# EAGLE board TSAL_rev01 (EAGLE 6.6.0)
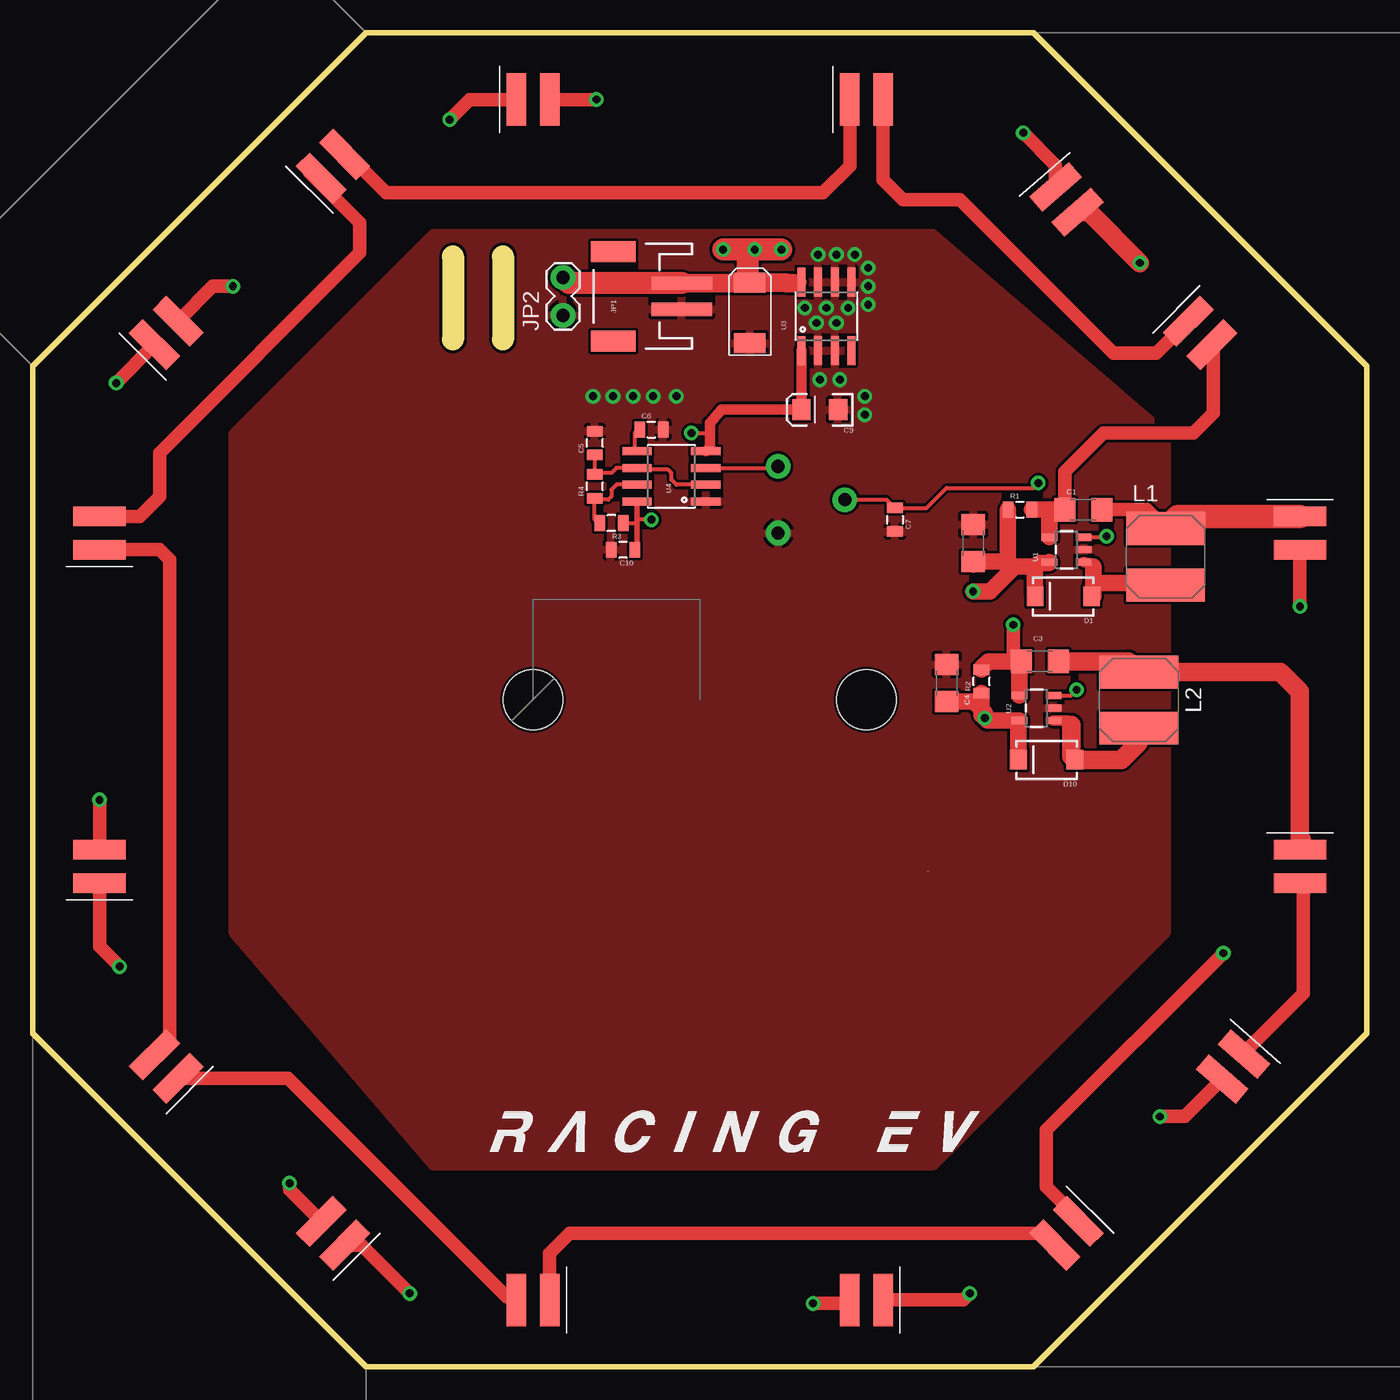
[diagram p0: board, top side]
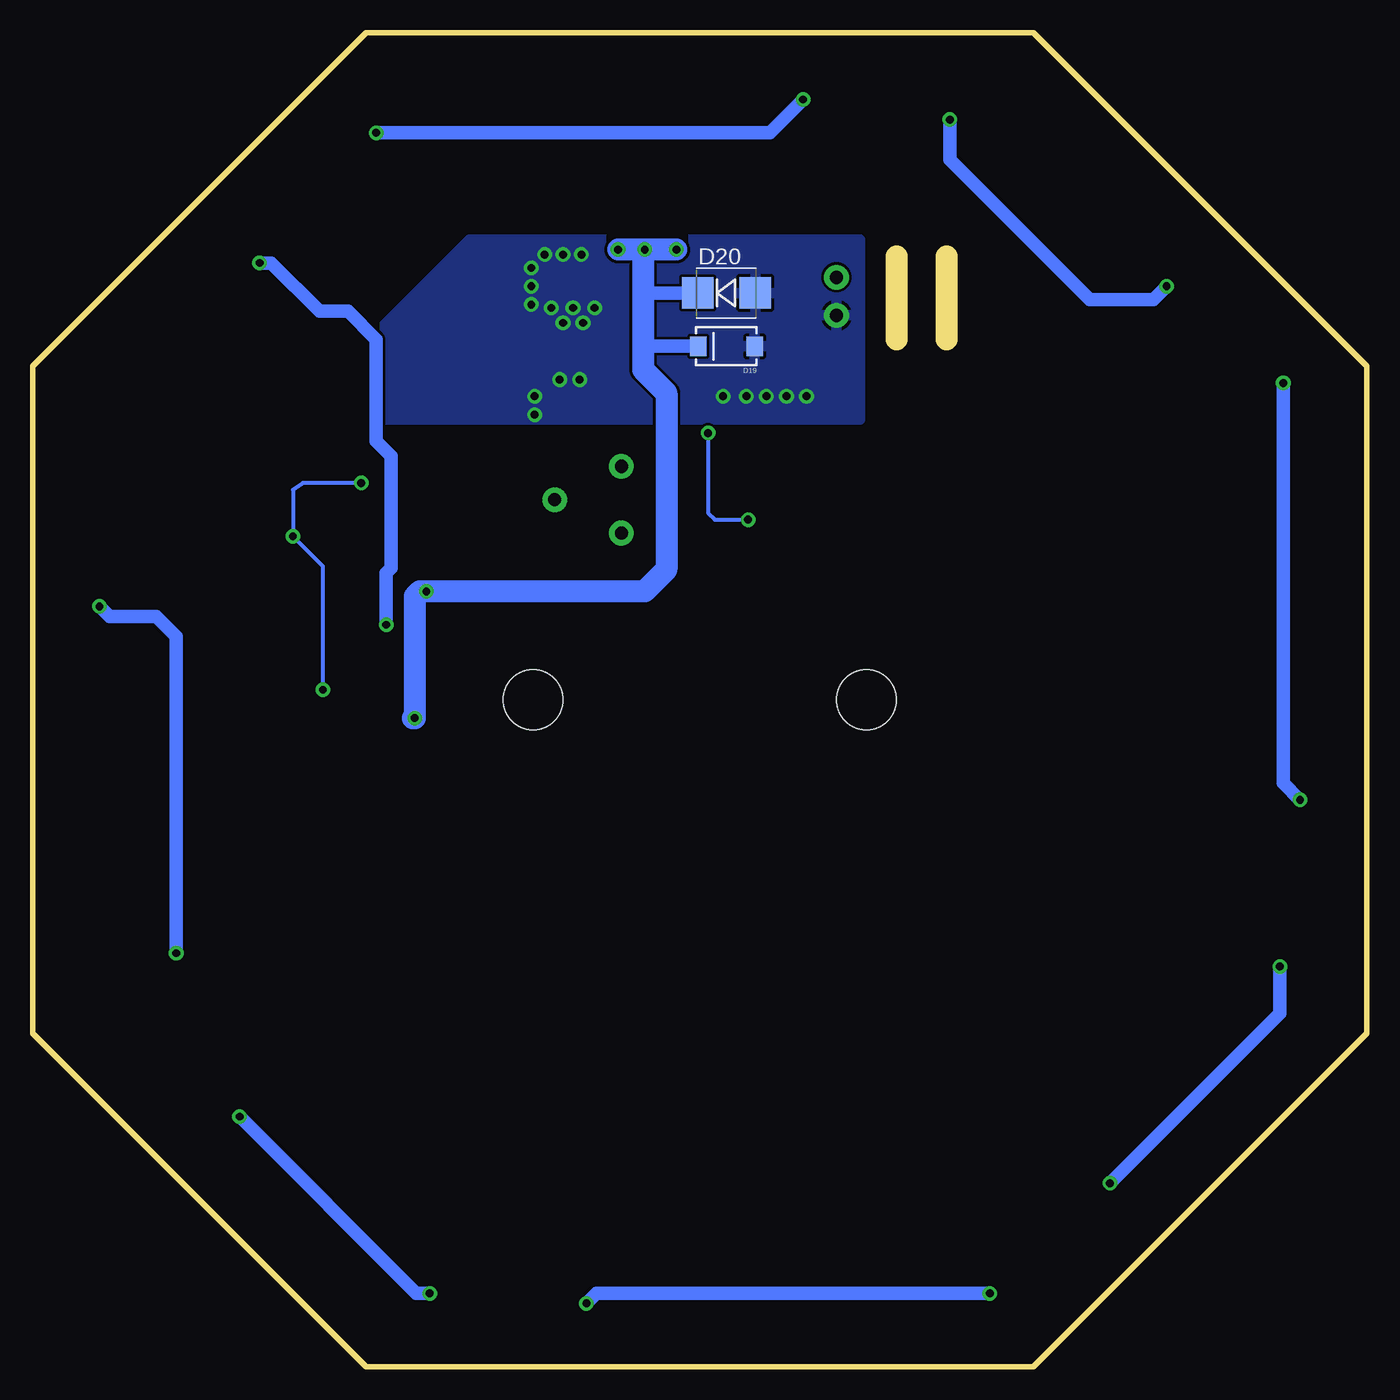
[diagram p1: board, bottom side, seen from below]

Size 101.6 x 101.6 mm. Coordinates in mm from the lower left corner, seen from the top.
Outline: 35.81,84.58 35.81,78.23
Outline: 32,84.58 32,78.23
Outline: 25.4,101.6 0,76.2 0,25.4 25.4,0 76.2,0 101.6,25.4 101.6,76.2 76.2,101.6 25.4,101.6
Copper layers (1*16): Top 0.035mm / dielectric 1.5mm / Bottom 0.035mm
Design rules "Sparkfun": minimum track width 8mil, minimum drill 20mil, track to track 8mil, track to pad 8mil, pad to pad 8mil, via to via 8mil, smd to smd 8mil, copper to edge 8mil, drill to drill 8mil, minimum pad ring 12mil, minimum via ring 10mil, stop-mask expansion 4mil, vias tented up to drill 20mil, thermal gap 10mil
Net classes: 0 default: width 0.254 mm; 1 power: width 0.508 mm
Holes 4.57 mm at 38.1,50.8 63.5,50.8

## Footprints (pad centres in the part's own frame; a part is rotated, then mirrored left to right if it is on the bottom)
1206 = smd 1.6 x 1.8: 1 -1.4,0; 2 1.4,0
0805 = smd 0.8 x 1.2: 1 -0.9,0; 2 0.9,0
EIA6032 = smd 1.5 x 2.4: P$1 -2.3,0; P$2 2.3,0
EIA3216 = smd 1.4 x 1.6: A 1.4,0; C -1.4,0
SMA-DIODE = smd 1.27 x 1.47: A -2.15,0; C 2.15,0
LED-SM = smd 1.5 x 4: A 1.27,0; C -1.27,0
SMB-DIODE = smd 2.4 x 2.4: A 2.2,0; C -2.2,0
JST-2-SMD = smd 1 x 4.6: 1 -1,-3.7; 2 1,-3.7 | smd 1.6 x 3.4: NC1 -3.4,1.5; NC2 3.4,1.5
1X02_LOCK = drill 1.016 pad 1.88: 1 -0.178,0; 2 2.718,0
SRN6045 = smd 2.5 x 6: 1 -2.175,-0.175; 2 2.125,-0.175
TRIM_POT = drill 1 pad 1.88: 1 5.08,0; 2 0,2.54; 3 0,-2.54
SOT23-5 = smd 0.55 x 1.2: 1 -0.95,-1.3; 2 0,-1.3; 3 0.95,-1.3; 4 0.95,1.3; 5 -0.95,1.3
SO08 = smd 0.61 x 2.21: 1 -1.905,-2.616; 2 -0.635,-2.616; 3 0.635,-2.616; 4 1.905,-2.616; 5 1.905,2.616; 6 0.635,2.616; 7 -0.635,2.616; 8 -1.905,2.616

## Placement (x,y rotation side)
C1  1uF  [1206]  80.01,65.28 0 top
C2  2.2uF  [1206]  71.63,62.74 90 top
C3  1uF  [1206]  76.71,53.72 0 top
C4  2.2uF  [1206]  69.6,52.07 90 top
C5  47uF  [0805]  42.8,70.36 90 top
C6  10uF  [0805]  47.12,71.37 0 top
C7  10uF  [0805]  65.66,64.52 270 top
C8  [EIA6032]  54.61,80.26 270 top
C9  [EIA3216]  59.94,72.9 180 top
C10  .1uF  [0805]  44.96,62.23 180 top
D1  MBRA140  [SMA-DIODE]  78.49,58.67 180 top
D2  [LED-SM]  88.9,78.74 315 top
D3  [LED-SM]  63.5,96.52 0 top
D4  [LED-SM]  22.86,91.44 45 top
D5  [LED-SM]  5.08,63.5 90 top
D6  [LED-SM]  10.16,22.86 135 top
D7  [LED-SM]  38.1,5.08 180 top
D8  [LED-SM]  78.74,10.16 225 top
D9  [LED-SM]  96.52,63.5 270 top
D10  MBRA140  [SMA-DIODE]  77.22,46.23 180 top
D11  [LED-SM]  78.74,88.9 311 top
D12  [LED-SM]  38.1,96.52 0 top
D13  [LED-SM]  10.16,78.74 45 top
D14  [LED-SM]  5.08,38.1 90 top
D15  [LED-SM]  22.86,10.16 135 top
D16  [LED-SM]  63.5,5.08 180 top
D17  [LED-SM]  91.44,22.86 228.8 top
D18  [LED-SM]  96.52,38.1 270 top
D19  TVS  [SMA-DIODE]  48.77,77.72 180 bottom
D20  30v  [SMB-DIODE]  48.77,81.79 0 bottom
JP1  M02-JST-2MM-SMT  [JST-2-SMD]  45.72,81.53 90 top
JP2  M02LOCK  [1X02_LOCK]  40.39,80.26 90 top
L1  33uH  [SRN6045]  86.11,61.72 90 top
L2  33uH  [SRN6045]  84.07,50.8 90 top
R1  5R  [0805]  75.18,65.28 0 top
R2  5R  [0805]  72.26,52.2 90 top
R3  10k  [0805]  44.07,64.26 180 top
R4  1k  [0805]  42.8,67.06 90 top
RV1  [TRIM_POT]  56.77,66.04 0 top
U1  [SOT23-5]  78.74,62.23 90 top
U2  [SOT23-5]  76.45,50.16 90 top
U3  LM2931D-5.0R2G  [SO08]  60.45,80.01 0 top
U4  [SO08]  48.64,67.82 90 top
U$1  LOGOL  [L-L]  19.81,12.32 0 top

## Library data of the parts
C1 C3 = SparkFun-Capacitors; PROD_ID: CAP-09822
C2 C4 = SparkFun-Capacitors; PROD_ID: CAP-10009
C5-C10 = SparkFun-Capacitors
D1 D10 = SparkFun-DiscreteSemi; PROD_ID: DIO-08053
D2-D9 D11-D18 = FSAE Eletric
D19 D20 = SparkFun-DiscreteSemi
JP1 = SparkFun-Connectors; PROD_ID: CONN-08352
JP2 = SparkFun-Connectors
L1 L2 = SparkFun-Passives; PROD_ID: NDUC-11627
R1-R4 = SparkFun-Resistors; PROD_ID: RES-11622
RV1 = SparkFun-Electromechanical
U1 U2 = SparkFun-PowerIC; PROD_ID: IC-11626
U3 = SparkFun-PowerIC
U4 = SparkFun-AnalogIC
U$1 = untitled

## Nets
+5V: C9.A C10.1 R3.1 U3.1 U4.4 U4.8
GND: C2.2 C4.2 C5.2 C6.2 C7.2 C8.P$2 C9.C C10.2 D19.A D20.A JP1.1 JP2.1 RV1.3 U1.2 U2.2 U3.2 U3.3 U3.5 U3.6 U3.7 U4.1
N$1: D2.C D3.A
N$2: D4.C D5.A
N$3: D6.C D7.A
N$4: D8.C D9.A
N$5: D3.C D4.A
N$6: D5.C D6.A
N$7: D7.C D8.A
N$8: D11.C D12.A
N$9: D13.C D14.A
N$10: D15.C D16.A
N$11: D17.C D18.A
N$12: D12.C D13.A
N$13: D14.C D15.A
N$14: D16.C D17.A
N$15: R3.2 R4.1 U4.7
N$16: C5.1 R4.2 U4.2 U4.6
N$17: C6.1 U4.5
N$18: RV1.2 U4.3
N$20: C7.1 RV1.1 U1.3 U2.3
OUT+: C1.1 D2.A R1.2 U1.4
OUT+1: C3.1 D11.A R2.2 U2.4
OUT- [power]: C1.2 D9.C L1.2
OUT-1 [power]: C3.2 D18.C L2.2
SW: D1.A L1.1 U1.1
SW1: D10.A L2.1 U2.1
VIN: C2.1 C4.1 C8.P$1 D1.C D10.C D19.C D20.C JP1.2 JP2.2 R1.1 R2.1 U1.5 U2.5 U3.8

## Tracks (layer width: path | path; a pad name or v marks a point on that pad's centre or on a via)
+5V  (via drill 0.6)
  Top 0.305: R3.1 45.85,64.26 46.1,64.52 | 46.1,64.52 46.1,65.84 U4.8 | U4.4 51.51,71.17 51.46,71.12 v50.16,71.12 | v47.12,64.52 46.1,64.52
  Top 0.406: C10.1 46.02,62.48 U4.8
  Top 0.813: U3.1 58.55,73.41 C9.A 52.45,72.9 51.56,71.88 51.56,70.03 U4.4
  Bottom 0.305: v50.16,71.12 50.16,65.02 49.66,64.52 v47.12,64.52
GND  (via drill 0.6)
  other vias: 59.94,75.18 61.47,75.18 59.69,79.5 61.21,79.5 59.82,84.71 61.21,84.71 62.61,84.71 63.63,83.69 63.63,82.3 63.63,80.9 60.45,80.64 58.8,80.64 62.1,80.64 63.37,73.91 63.37,72.52 45.72,73.91 47.24,73.91 49.02,73.91 44.2,73.91 42.67,73.91
  pour Top: 15.24,33.02 15.24,71.12 30.48,86.36 68.58,86.36 86.36,71.12 86.36,33.02 68.58,15.24 30.48,15.24
  pour Bottom: 38.61,85.85 68.33,85.85 77.47,76.71 77.47,72.14 38.61,72.14
N$1
  Top 1.016: D3.A 64.77,90.42 66.29,88.9 70.61,88.9 82.3,77.22 85.58,77.22 D2.C
N$2
  Top 1.016: D5.A 8.13,64.77 9.65,66.29 9.65,69.6 24.89,84.84 24.89,87.12 21.08,90.93 21.57,90.93 D4.C
N$3
  Top 1.016: D6.C 19.44,21.96 36.07,5.33 36.58,5.33 D7.A
N$4  (via drill 0.6)
  Top 1.016: D8.C 79.64,11.29 77.22,13.72 77.22,18.03 v90.68,31.5 | v96.52,57.91 D9.A
  Bottom 1.016: v90.68,31.5 90.68,55.63 92.2,57.15 95.76,57.15 v96.52,57.91
N$5
  Top 1.016: D4.A 23.99,92.34 26.92,89.41 60.2,89.41 62.23,91.44 62.23,96.01 62.48,96.77 61.98,96.77 D3.C
N$6
  Top 1.016: D5.C 9.65,62.23 10.41,61.47 10.41,24.91 D6.A
N$7
  Top 1.016: D7.C 39.37,8.64 40.89,10.16 76.94,10.16 D8.A
N$8  (via drill 0.6)
  Top 1.016: D11.C 77.91,91.51 v75.44,93.98 | v42.93,96.52 D12.A
  Bottom 1.016: v75.44,93.98 45.47,93.98 v42.93,96.52
N$9  (via drill 0.6)
  Top 1.016: D13.C | D13.C v6.35,74.93 | v5.08,43.18 D14.A
  Bottom 1.016: v6.35,74.93 6.35,44.45 v5.08,43.18
N$10  (via drill 0.6)
  Top 1.016: D15.C 25.03,9.26 v28.7,5.59 | v59.44,4.83 61.98,4.83 D16.A
  Bottom 1.016: v28.7,5.59 58.67,5.59 v59.44,4.83
N$11
  Top 1.016: D17.C 92.28,23.95 96.77,28.45 96.77,36.58 D18.A
N$12  (via drill 0.6)
  Top 1.016: D12.C 33.27,96.52 v31.75,95 | v15.24,82.3 13.72,82.3 D13.A
  Bottom 1.016: v31.75,95 31.75,91.95 21.08,81.28 16.26,81.28 v15.24,82.3
N$13  (via drill 0.6)
  Top 1.016: D14.C 5.08,32 v6.6,30.48 | v19.56,13.97 19.56,13.46 D15.A
  Bottom 1.016: v6.6,30.48 6.6,26.92 v19.56,13.97
N$14  (via drill 0.6)
  Top 1.016: D16.C 70.87,5.08 v71.37,5.59 | v85.85,19.05 87.75,19.05 D17.A
  Bottom 1.016: v71.37,5.59 72.39,5.59 v85.85,19.05
N$15
  Top 0.305: U4.7 44.45,67.18 44.07,66.8 44.07,66.29 43.81,66.04 42.91,66.04 R4.1 42.8,64.52 43.05,64.26 R3.2
N$16
  Top 0.305: C5.1 R4.2 42.91,68.07 44.07,68.07 44.45,68.45 U4.6 46.15,68.33 48.39,68.33 48.64,68.07 48.64,67.56 49.02,67.18 U4.2
N$17
  Top 0.305: C6.1 46.1,71.37 45.85,71.12 45.85,69.9 U4.5
N$18
  Top 0.305: U4.3 56.64,68.45 RV1.2
N$20  (via drill 0.6)
  Top 0.305: RV1.1 65.03,66.04 C7.1 68.08,65.42 69.6,66.93 76.2,66.93 v76.58,67.31 | 81.76,63.25 v81.79,63.25 81.72,63.18 U1.3 | U2.3 79.05,51.11 v79.5,51.56
  Bottom 0.305: v76.58,67.31 81.03,67.31 81.79,66.8 v81.79,63.25 79.5,60.96 v79.5,51.56
OUT+
  Top 1.016: C1.1 78.61,68.2 81.53,71.12 88.39,71.12 89.92,72.64 89.92,77.72 D2.A
  Top 1.27: C1.1 77.47,65.28 | 77.47,65.28 R1.2 | U1.4 77.44,65.25 77.47,65.28
OUT+1  (via drill 0.6)
  Top 1.016: v74.68,56.52 74.68,54.35 C3.1
  Top 1.27: R2.2 72.26,53.21 72.77,53.72 C3.1 75.15,53.57 U2.4
  Top 1.422: D11.A 80.46,87.94 v84.33,84.07
  Bottom 1.016: v84.33,84.07 83.44,84.07 79.76,80.39 77.6,80.39 75.44,78.23 75.44,70.48 74.3,69.34 74.3,60.83 74.68,60.45 v74.68,56.52
OUT-
  Top 1.016: C1.2 84.85,65.28 L1.2
  Top 1.778: D9.C 87.2,64.77 L1.2
OUT-1
  Top 1.422: C3.2 83.45,53.72 L2.2 95.03,52.92 96.52,51.43 96.52,40.26 96.65,40.13 96.65,39.5 D18.C
SW
  Top 0.813: U1.1 80.55,61.18 80.77,60.96
  Top 1.27: 80.77,59.3 80.77,58.67 D1.A 80.77,59.3 | 80.77,59.3 80.77,59.69 | 80.77,59.69 86.14,59.69 L1.1 | 80.77,60.96 80.77,59.69
SW1
  Top 0.813: U2.1 78.8,49.21 79.12,48.89
  Top 1.422: L2.1 84.2,48.58 84.2,47.5 82.93,46.23 D10.A 79.12,46.47 79.12,48.89
VIN  (via drill 0.6)
  Top 0.305: U3.8 54.53,82.63 54.48,82.68
  Top 0.813: 57.91,82.55 58.47,82.55 U3.8
  Top 1.27: D1.C 76.34,60.84 76.45,60.96 | U1.5 77.37,61.21 76.71,61.21 76.45,60.96 | R1.1 74.28,61.35 | 74.28,61.35 74.68,60.96 74.8,60.96 | 74.8,60.96 76.45,60.96 | v72.52,49.4 72.52,49.78 71.63,50.67 C4.1 | D10.C 75.07,49.13 U2.5 72.7,49.21 v72.52,49.4 | R2.1 72.26,49.66 v72.52,49.4 | 74.28,61.35 74.27,61.34 C2.1 71.63,61.09 | v71.63,59.05 72.9,59.05 74.8,60.96
  Top 1.422: JP1.2 55.09,82.53 C8.P$1 57.39,82.56 57.4,82.55 57.91,82.55
  Top 1.676: 54.48,82.68 54.48,84.58 v54.99,85.09 | v57.02,85.09 v52.58,85.09 | JP1.2 40.83,82.53 JP2.2
  Bottom 1.016: D20.C 55.12,81.79 55.12,81.53 | D19.C 55.12,77.72
  Bottom 1.676: 55.12,85.09 v54.99,85.09 v52.58,85.09 | 55.12,85.09 v57.02,85.09 | 55.12,85.09 55.12,81.53 55.12,77.72 55.12,75.95 53.34,74.17 53.34,60.71 54.99,59.05 v71.63,59.05 72.14,59.05 72.52,58.67 v72.52,49.4 72.64,49.4